# EAGLE board motorDrive nayef Almurisi Final (EAGLE 7.2.0)
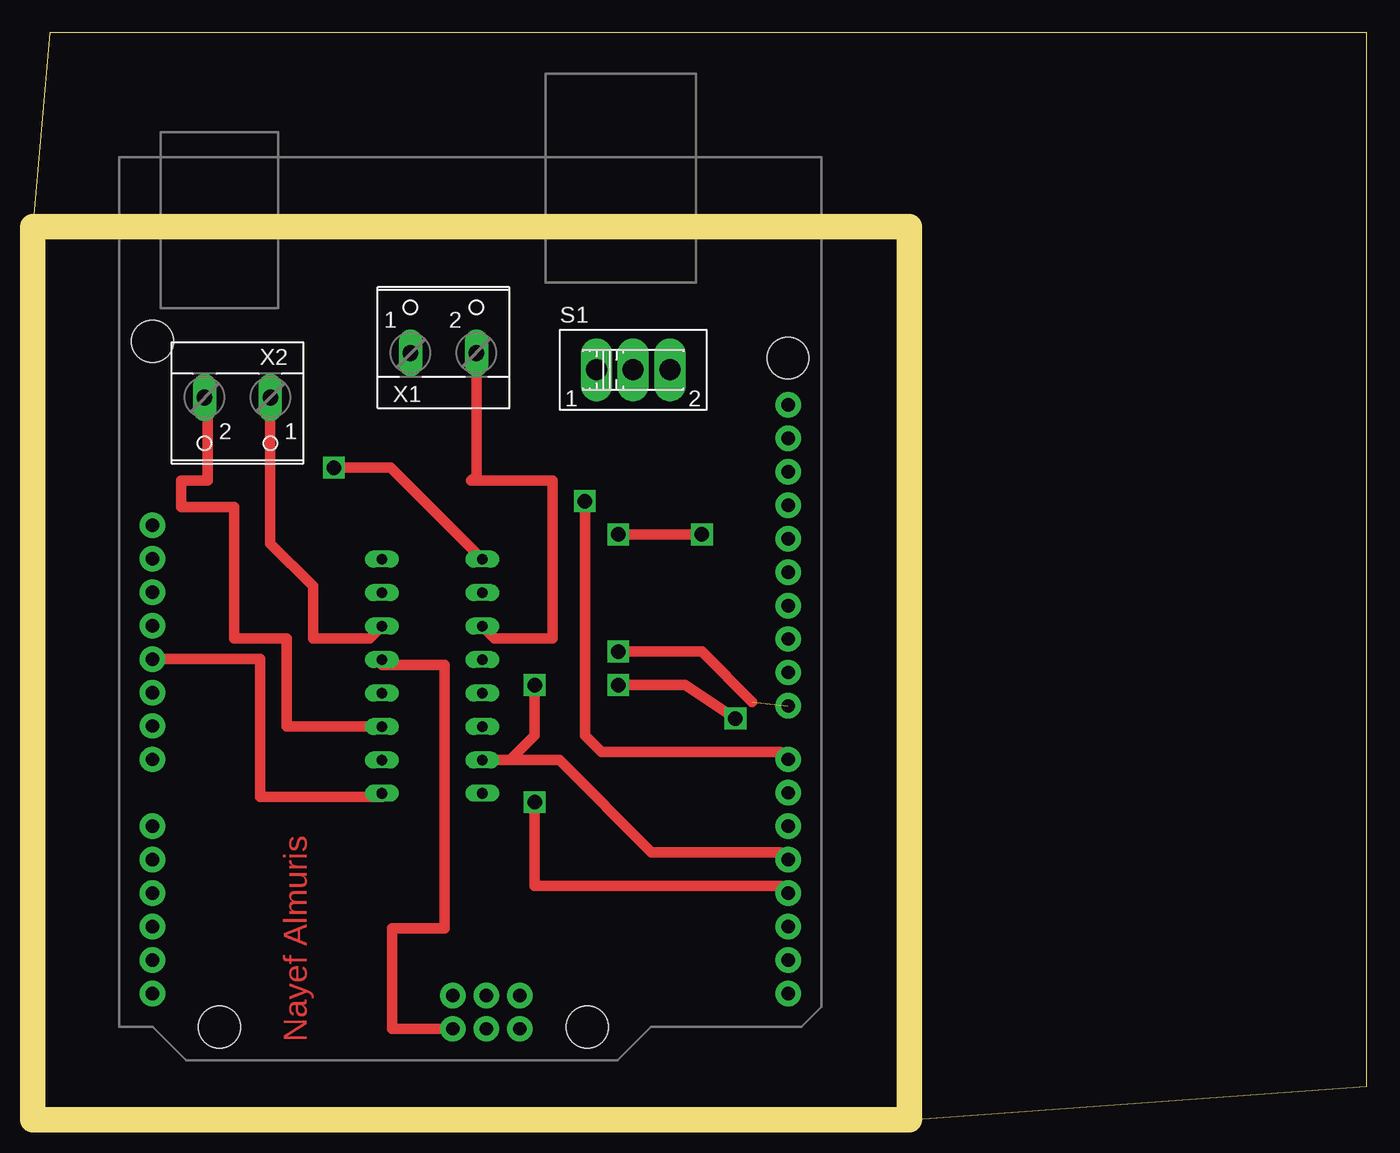
[diagram p0: board, top side]
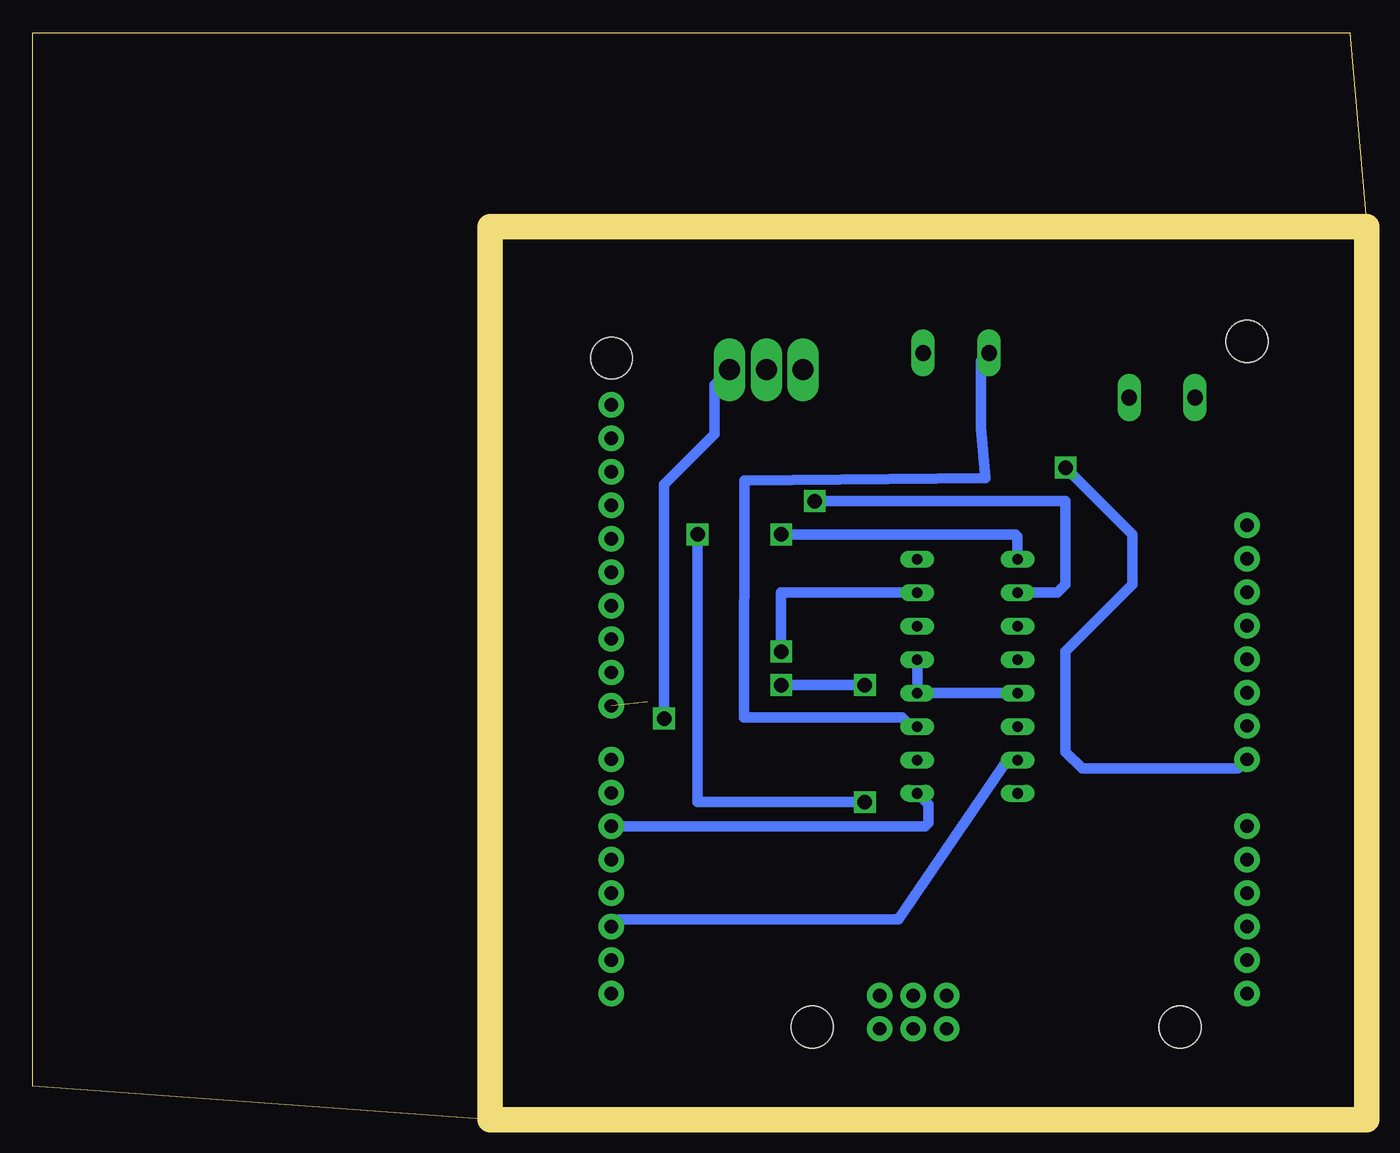
[diagram p1: board, bottom side, seen from below]

Size 101.27 x 82.54 mm. Coordinates in mm from the lower left corner, seen from the top.
Outline: 66.54,0 101.27,2.54 101.27,82.54 1.27,82.54 0,67.81
Outline: 0,67.81 0,0 66.54,0
Outline: 0,67.81 66.54,67.81 66.54,0
Copper layers (1*16): Top 0.035mm / dielectric 1.5mm / Bottom 0.035mm
Design rules "default": minimum track width 10mil, minimum drill 24mil, track to track 8mil, track to pad 8mil, pad to pad 8mil, via to via 8mil, smd to smd 8mil, copper to edge 40mil, drill to drill 8mil, minimum pad ring 10mil, minimum via ring 8mil, stop-mask expansion 4mil, vias tented up to drill 0mil, thermal gap 10mil

## Footprints (pad centres in the part's own frame; a part is rotated, then mirrored left to right if it is on the bottom)
ARDUINO_R3 = drill 1.016 pad 1.93: 3.3V 35.56,2.54; 5V 38.1,2.54; A0 50.8,2.54; A1 53.34,2.54; A2 55.88,2.54; A3 58.42,2.54; A4 60.96,2.54; A5 63.5,2.54; AREF 23.876,50.8; D0 63.5,50.8; D1 60.96,50.8; D2 58.42,50.8; D3 55.88,50.8; D4 53.34,50.8; D5 50.8,50.8; D6 48.26,50.8; D7 45.72,50.8; D8 41.656,50.8; D9 39.116,50.8; D10 36.576,50.8; D11 34.036,50.8; D12 31.496,50.8; D13 28.956,50.8; GND@1 40.64,2.54; GND@2 43.18,2.54; GND@3 26.416,50.8; GND@4 66.18,25.35; IOREF 30.48,2.54; MISO 63.64,30.43; MOSI 66.18,27.89; NC 27.94,2.54; RESET@1 33.02,2.54; RESET@2 63.64,25.35; SCK 63.64,27.89; SCL 18.796,50.8; SDA 21.336,50.8; VCC 66.18,30.43; VIN 45.72,2.54 | hole 3.175: 15.24,50.8; 66.04,35.56; 66.04,7.62; 13.97,2.54
SLIDE_SWITCH = drill 1.6 long: 1 -2.794,0; 2 0,0; 3 2.794,0
DIP16 = drill 0.8 long: P1 -8.89,-3.81; P2 -6.35,-3.81; P3 -3.81,-3.81; P4 -1.27,-3.81; P5 1.27,-3.81; P6 3.81,-3.81; P7 6.35,-3.81; P8 8.89,-3.81; P9 8.89,3.81; P10 6.35,3.81; P11 3.81,3.81; P12 1.27,3.81; P13 -1.27,3.81; P14 -3.81,3.81; P15 -6.35,3.81; P16 -8.89,3.81
2PIN-SCREW-TERMINAL = drill 1.194 long: 1 -2.5,-1.27; 2 2.5,-1.27

## Placement (x,y rotation side)
J1  ARDUINO_UNO_R3  [ARDUINO_R3]  6.54,73.09 270 top
S1  [SLIDE_SWITCH]  45.58,56.96 0 top
U$1  MOTOR_DRIVERDIP16  [DIP16]  30.31,33.68 90 top
X1  [2PIN-SCREW-TERMINAL]  31.17,59.5 0 top
X2  [2PIN-SCREW-TERMINAL]  15.53,53.58 180 top

## Library data of the parts
J1 S1 U$1 = ISCTRainingProgram
X1 X2 = ISCTRainingProgram; MPN: 237-102; OC_FARNELL: unknown; OC_NEWARK: 70K9898

## Nets
GND: U$1.P4 U$1.P5 U$1.P13
N$1: J1.GND@4 U$1.P12
N$2: U$1.P6 X1.2
N$3: U$1.P3 X1.1
N$4: U$1.P11 X2.1
N$5: U$1.P14 X2.2
N$6: J1.5V U$1.P16
N$7: J1.D4 S1.3 U$1.P2
N$8: J1.D3 U$1.P9
N$9: J1.D8 U$1.P7
N$10: J1.VIN U$1.P8
N$11: J1.D7 U$1.P10
N$13: J1.D2 U$1.P15
N$14: J1.D5 U$1.P1

## Tracks (layer width: path | path; a pad name or v marks a point on that pad's centre or on a via)
GND
  Bottom 0.813: U$1.P13 U$1.P4 U$1.P5
N$1
  Top 0.813: J1.GND@4 27.27,6.91 27.27,14.54 31.27,14.54 31.27,34.54 26.5,34.54 U$1.P12
N$2
  Top 0.813: X1.2 33.67,48.94 33.27,48.54 39.46,48.54 39.46,36.54 35.07,36.54 U$1.P6
N$3
  Bottom 0.813: U$1.P3 34.6,29.87 35.27,30.54 47.27,30.54 47.25,48.54 28.95,48.74 29.27,52.54 29.27,57.63 X1.1
N$4
  Top 0.813: X2.1 18.03,43.78 21.27,40.54 21.27,36.54 25.55,36.54 U$1.P11
N$5
  Top 0.813: U$1.P14 19.27,29.87 19.27,36.54 15.27,36.54 15.27,46.54 11.27,46.54 11.27,48.54 13.27,48.54 13.27,54.61 X2.2
N$6
  Top 0.813: J1.5V 17.27,34.99 17.27,24.54 26.5,24.54 U$1.P16
N$7  (via drill 1.1)
  Top 0.813: J1.D4 56.77,20.32 46.99,20.32 39.98,27.33 U$1.P2 36.22,27.33 38.1,29.21 v38.1,33.02 | v44.45,33.02 49.53,33.02 v53.34,30.48
  Bottom 0.813: v38.1,33.02 v44.45,33.02 | v53.34,30.48 53.34,48.26 49.53,52.07 49.53,55.8 S1.3
N$8  (via drill 1.1)
  Top 0.813: J1.D3 56.77,17.78 38.1,17.78 v38.1,24.13 | v50.8,44.45 v44.45,44.45
  Bottom 0.813: v38.1,24.13 50.8,24.13 v50.8,44.45 | v44.45,44.45 26.67,44.45 26.5,44.28 U$1.P9
N$9  (via drill 1.1)  (1 unrouted)
  Top 0.813: v44.45,35.56 50.8,35.56 54.61,31.75
  Bottom 0.813: U$1.P7 44.45,40.03 v44.45,35.56
N$10  (via drill 1.1)
  Top 0.813: v22.86,49.53 27.16,49.53 U$1.P8
  Bottom 0.813: J1.VIN 9.78,26.67 21.59,26.67 22.86,27.94 22.86,35.56 17.78,40.64 17.78,44.45 v22.86,49.53
N$11  (via drill 1.1)
  Top 0.813: J1.D7 56.77,27.94 43.18,27.94 41.91,29.21 v41.91,46.99
  Bottom 0.813: v41.91,46.99 22.86,46.99 22.86,40.64 23.47,40.03 U$1.P10
N$13
  Bottom 0.813: J1.D2 56.77,15.24 35.56,15.24 27.28,27.33 U$1.P15
N$14
  Bottom 0.813: J1.D5 33.52,22.29 33.27,22.54 33.27,23.94 U$1.P1

## Text on the board
Top: Nayef Almuris